# Allegro board 2017-03-26_LED-Panel_G4_V1.brd
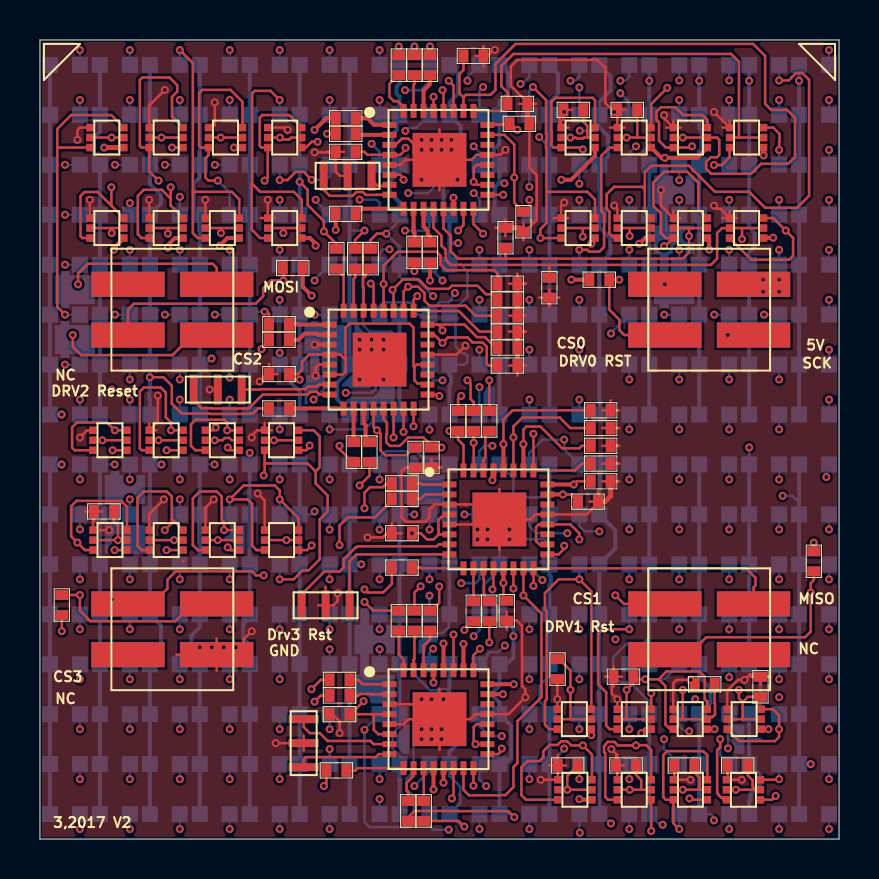
[diagram p0: board, top side]
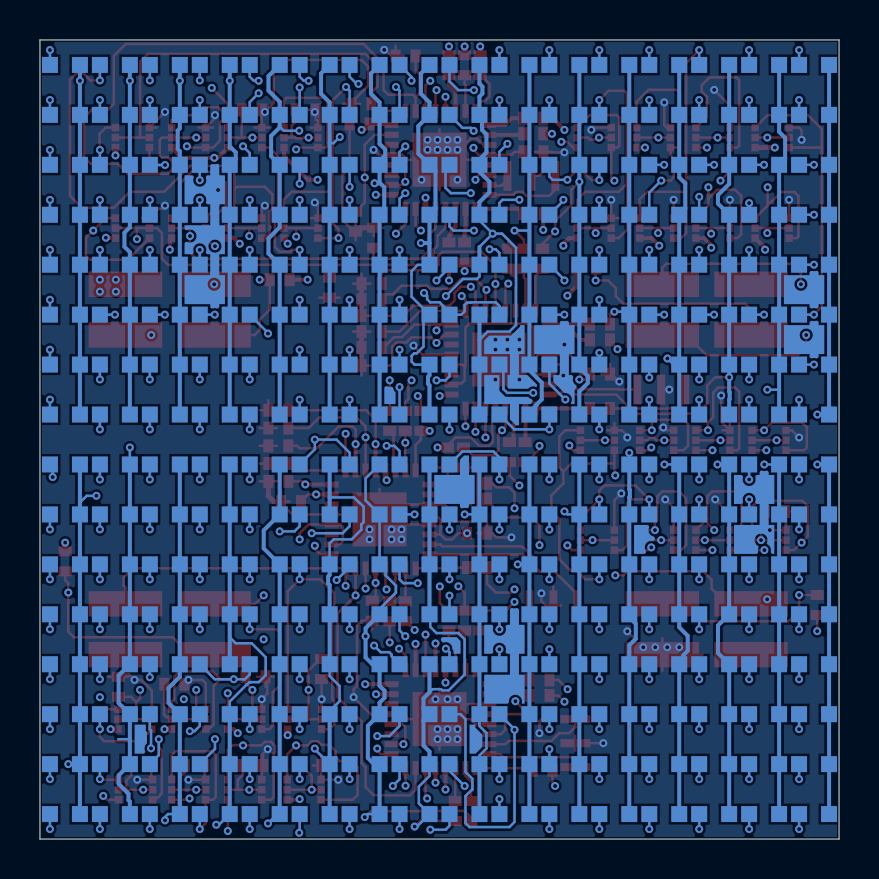
[diagram p1: board, bottom side, seen from below]

Outline 40 x 40 mm; copper layers: TOP, GND, LAYER 1, LAYER_2, PWR, BOTTOM. Coordinates in mm from the lower left corner of the outline.
Outline path: 0,40 0,0 40,0 40,40 0,40

## Design rules (mm)
constraint set DEFAULT: min track width 0.127

## Placement (name value [footprint] x y rotation side)
C1  CAP NP  [EIA0402]  15.3 34.4 180 top
C2  CAP NP  [EIA0402]  15 6.25 180 top
C3  CAP NP  [EIA0402]  18.12 15.31 180 top
C4  CAP NP  [EIA0402]  11.96 23.27 180 top
D1  LED  [LED-0603]  3.75 1.25 180 bottom
D2  LED  [LED-0603]  6.25 16.25 180 bottom
D3  LED  [LED-0603]  6.25 1.25 180 bottom
D4  LED  [LED-0603]  1.25 18.75 180 bottom
D5  LED  [LED-0603]  1.25 16.25 180 bottom
D6  LED  [LED-0603]  1.25 13.75 180 bottom
D7  LED  [LED-0603]  1.25 11.25 180 bottom
D8  LED  [LED-0603]  1.25 8.75 180 bottom
D9  LED  [LED-0603]  1.25 6.25 180 bottom
D10  LED  [LED-0603]  1.25 3.75 180 bottom
D11  LED  [LED-0603]  1.25 1.25 180 bottom
D12  LED  [LED-0603]  3.75 18.75 180 bottom
D13  LED  [LED-0603]  3.75 16.25 180 bottom
D14  LED  [LED-0603]  3.75 13.75 180 bottom
D15  LED  [LED-0603]  3.75 11.25 180 bottom
D16  LED  [LED-0603]  3.75 8.75 180 bottom
D17  LED  [LED-0603]  3.75 6.25 180 bottom
D18  LED  [LED-0603]  3.75 3.75 180 bottom
D19  LED  [LED-0603]  6.25 18.75 180 bottom
D20  LED  [LED-0603]  6.25 13.75 180 bottom
D21  LED  [LED-0603]  6.25 11.25 180 bottom
D22  LED  [LED-0603]  6.25 8.75 180 bottom
D23  LED  [LED-0603]  6.25 6.25 180 bottom
D24  LED  [LED-0603]  6.25 3.75 180 bottom
D25  LED  [LED-0603]  8.75 18.75 180 bottom
D26  LED  [LED-0603]  8.75 16.25 180 bottom
D27  LED  [LED-0603]  8.75 13.75 180 bottom
D28  LED  [LED-0603]  8.75 11.25 180 bottom
D29  LED  [LED-0603]  8.75 8.75 180 bottom
D30  LED  [LED-0603]  8.75 6.25 180 bottom
D31  LED  [LED-0603]  8.75 3.75 180 bottom
D32  LED  [LED-0603]  8.75 1.25 180 bottom
D33  LED  [LED-0603]  11.25 18.75 180 bottom
D34  LED  [LED-0603]  11.25 16.25 180 bottom
D35  LED  [LED-0603]  11.25 13.75 180 bottom
D36  LED  [LED-0603]  11.25 11.25 180 bottom
D37  LED  [LED-0603]  11.25 8.75 180 bottom
D38  LED  [LED-0603]  11.25 6.25 180 bottom
D39  LED  [LED-0603]  11.25 3.75 180 bottom
D40  LED  [LED-0603]  11.25 1.25 180 bottom
D41  LED  [LED-0603]  13.75 18.75 180 bottom
D42  LED  [LED-0603]  13.75 16.25 180 bottom
D43  LED  [LED-0603]  13.75 13.75 180 bottom
D44  LED  [LED-0603]  13.75 11.25 180 bottom
D45  LED  [LED-0603]  13.75 8.75 180 bottom
D46  LED  [LED-0603]  13.75 6.25 180 bottom
D47  LED  [LED-0603]  13.75 3.75 180 bottom
D48  LED  [LED-0603]  13.75 1.25 180 bottom
D49  LED  [LED-0603]  16.25 18.75 180 bottom
D50  LED  [LED-0603]  16.25 16.25 180 bottom
D51  LED  [LED-0603]  16.25 13.75 180 bottom
D52  LED  [LED-0603]  16.25 11.25 180 bottom
D53  LED  [LED-0603]  16.25 8.75 180 bottom
D54  LED  [LED-0603]  16.25 6.25 180 bottom
D55  LED  [LED-0603]  16.25 3.75 180 bottom
D56  LED  [LED-0603]  16.25 1.25 180 bottom
D57  LED  [LED-0603]  18.75 18.75 180 bottom
D58  LED  [LED-0603]  18.75 16.25 180 bottom
D59  LED  [LED-0603]  18.75 13.75 180 bottom
D60  LED  [LED-0603]  18.75 11.25 180 bottom
D61  LED  [LED-0603]  18.75 8.75 180 bottom
D62  LED  [LED-0603]  18.75 6.25 180 bottom
D63  LED  [LED-0603]  18.75 3.75 180 bottom
D64  LED  [LED-0603]  18.75 1.25 180 bottom
D65  LED  [LED-0603]  21.25 36.25 180 bottom
D66  LED  [LED-0603]  21.25 33.75 180 bottom
D67  LED  [LED-0603]  21.25 31.25 180 bottom
D68  LED  [LED-0603]  21.25 28.75 180 bottom
D69  LED  [LED-0603]  21.25 26.25 180 bottom
D70  LED  [LED-0603]  21.25 21.25 180 bottom
D71  LED  [LED-0603]  23.75 36.25 180 bottom
D72  LED  [LED-0603]  23.75 33.75 180 bottom
D73  LED  [LED-0603]  23.75 31.25 180 bottom
D74  LED  [LED-0603]  23.75 28.75 180 bottom
D75  LED  [LED-0603]  23.75 26.25 180 bottom
D76  LED  [LED-0603]  23.75 23.75 180 bottom
D77  LED  [LED-0603]  23.75 21.25 180 bottom
D78  LED  [LED-0603]  26.25 33.75 180 bottom
D79  LED  [LED-0603]  26.25 31.25 180 bottom
D80  LED  [LED-0603]  26.25 28.75 180 bottom
D81  LED  [LED-0603]  26.25 26.25 180 bottom
D82  LED  [LED-0603]  26.25 23.75 180 bottom
D83  LED  [LED-0603]  26.25 21.25 180 bottom
D84  LED  [LED-0603]  21.25 38.75 180 bottom
D85  LED  [LED-0603]  21.25 23.75 180 bottom
D86  LED  [LED-0603]  23.75 38.75 180 bottom
D87  LED  [LED-0603]  26.25 38.75 180 bottom
D88  LED  [LED-0603]  26.25 36.25 180 bottom
D89  LED  [LED-0603]  28.75 38.75 180 bottom
D90  LED  [LED-0603]  28.75 36.25 180 bottom
D91  LED  [LED-0603]  28.75 33.75 180 bottom
D92  LED  [LED-0603]  28.75 31.25 180 bottom
D93  LED  [LED-0603]  28.75 28.75 180 bottom
D94  LED  [LED-0603]  28.75 26.25 180 bottom
D95  LED  [LED-0603]  28.75 23.75 180 bottom
D96  LED  [LED-0603]  28.75 21.25 180 bottom
D97  LED  [LED-0603]  31.25 38.75 180 bottom
D98  LED  [LED-0603]  31.25 36.25 180 bottom
D99  LED  [LED-0603]  31.25 33.75 180 bottom
D100  LED  [LED-0603]  31.25 31.25 180 bottom
D101  LED  [LED-0603]  31.25 28.75 180 bottom
D102  LED  [LED-0603]  31.25 26.25 180 bottom
D103  LED  [LED-0603]  31.25 23.75 180 bottom
D104  LED  [LED-0603]  31.25 21.25 180 bottom
D105  LED  [LED-0603]  33.75 38.75 180 bottom
D106  LED  [LED-0603]  33.75 36.25 180 bottom
D107  LED  [LED-0603]  33.75 33.75 180 bottom
D108  LED  [LED-0603]  33.75 31.25 180 bottom
D109  LED  [LED-0603]  33.75 28.75 180 bottom
D110  LED  [LED-0603]  33.75 26.25 180 bottom
D111  LED  [LED-0603]  33.75 23.75 180 bottom
D112  LED  [LED-0603]  33.75 21.25 180 bottom
D113  LED  [LED-0603]  36.25 38.75 180 bottom
D114  LED  [LED-0603]  36.25 36.25 180 bottom
D115  LED  [LED-0603]  36.25 33.75 180 bottom
D116  LED  [LED-0603]  36.25 31.25 180 bottom
D117  LED  [LED-0603]  36.25 28.75 180 bottom
D118  LED  [LED-0603]  36.25 26.25 180 bottom
D119  LED  [LED-0603]  36.25 23.75 180 bottom
D120  LED  [LED-0603]  36.25 21.25 180 bottom
D121  LED  [LED-0603]  38.75 38.75 180 bottom
D122  LED  [LED-0603]  38.75 36.25 180 bottom
D123  LED  [LED-0603]  38.75 33.75 180 bottom
D124  LED  [LED-0603]  38.75 31.25 180 bottom
D125  LED  [LED-0603]  38.75 28.75 180 bottom
D126  LED  [LED-0603]  38.75 26.25 180 bottom
D127  LED  [LED-0603]  38.75 23.75 180 bottom
D128  LED  [LED-0603]  38.75 21.25 180 bottom
D129  LED  [LED-0603]  1.25 38.75 180 bottom
D130  LED  [LED-0603]  1.25 36.25 180 bottom
D131  LED  [LED-0603]  1.25 33.75 180 bottom
D132  LED  [LED-0603]  1.25 31.25 180 bottom
D133  LED  [LED-0603]  1.25 28.75 180 bottom
D134  LED  [LED-0603]  1.25 26.25 180 bottom
D135  LED  [LED-0603]  1.25 23.75 180 bottom
D136  LED  [LED-0603]  1.25 21.25 180 bottom
D137  LED  [LED-0603]  3.75 38.75 180 bottom
D138  LED  [LED-0603]  3.75 36.25 180 bottom
D139  LED  [LED-0603]  3.75 33.75 180 bottom
D140  LED  [LED-0603]  3.75 31.25 180 bottom
D141  LED  [LED-0603]  3.75 28.75 180 bottom
D142  LED  [LED-0603]  3.75 26.25 180 bottom
D143  LED  [LED-0603]  3.75 21.25 180 bottom
D144  LED  [LED-0603]  6.25 38.75 180 bottom
D145  LED  [LED-0603]  6.25 36.25 180 bottom
D146  LED  [LED-0603]  6.25 33.75 180 bottom
D147  LED  [LED-0603]  6.25 31.25 180 bottom
D148  LED  [LED-0603]  6.25 28.75 180 bottom
D149  LED  [LED-0603]  6.25 26.25 180 bottom
D150  LED  [LED-0603]  6.25 23.75 180 bottom
D151  LED  [LED-0603]  6.25 21.25 180 bottom
D152  LED  [LED-0603]  3.75 23.75 180 bottom
D153  LED  [LED-0603]  8.75 38.75 180 bottom
D154  LED  [LED-0603]  8.75 36.25 180 bottom
D155  LED  [LED-0603]  8.75 33.75 180 bottom
D156  LED  [LED-0603]  8.75 31.25 180 bottom
D157  LED  [LED-0603]  8.75 28.75 180 bottom
D158  LED  [LED-0603]  8.75 26.25 180 bottom
D159  LED  [LED-0603]  8.75 23.75 180 bottom
D160  LED  [LED-0603]  8.75 21.25 180 bottom
D161  LED  [LED-0603]  11.25 38.75 180 bottom
D162  LED  [LED-0603]  11.25 36.25 180 bottom
D163  LED  [LED-0603]  11.25 33.75 180 bottom
D164  LED  [LED-0603]  11.25 31.25 180 bottom
D165  LED  [LED-0603]  11.25 28.75 180 bottom
D166  LED  [LED-0603]  11.25 26.25 180 bottom
D167  LED  [LED-0603]  11.25 23.75 180 bottom
D168  LED  [LED-0603]  11.25 21.25 180 bottom
D169  LED  [LED-0603]  13.75 38.75 180 bottom
D170  LED  [LED-0603]  13.75 36.25 180 bottom
D171  LED  [LED-0603]  13.75 33.75 180 bottom
D172  LED  [LED-0603]  13.75 31.25 180 bottom
D173  LED  [LED-0603]  13.75 28.75 180 bottom
D174  LED  [LED-0603]  13.75 26.25 180 bottom
D175  LED  [LED-0603]  13.75 23.75 180 bottom
D176  LED  [LED-0603]  13.75 21.25 180 bottom
D177  LED  [LED-0603]  16.25 38.75 180 bottom
D178  LED  [LED-0603]  16.25 36.25 180 bottom
D179  LED  [LED-0603]  16.25 33.75 180 bottom
D180  LED  [LED-0603]  16.25 31.25 180 bottom
D181  LED  [LED-0603]  16.25 28.75 180 bottom
D182  LED  [LED-0603]  16.25 26.25 180 bottom
D183  LED  [LED-0603]  16.25 23.75 180 bottom
D184  LED  [LED-0603]  16.25 21.25 180 bottom
D185  LED  [LED-0603]  18.75 38.75 180 bottom
D186  LED  [LED-0603]  18.75 36.25 180 bottom
D187  LED  [LED-0603]  18.75 33.75 180 bottom
D188  LED  [LED-0603]  18.75 31.25 180 bottom
D189  LED  [LED-0603]  18.75 28.75 180 bottom
D190  LED  [LED-0603]  18.75 26.25 180 bottom
D191  LED  [LED-0603]  18.75 23.75 180 bottom
D192  LED  [LED-0603]  18.75 21.25 180 bottom
D193  LED  [LED-0603]  21.25 16.25 180 bottom
D194  LED  [LED-0603]  21.25 3.75 180 bottom
D195  LED  [LED-0603]  21.25 1.25 180 bottom
D196  LED  [LED-0603]  23.75 13.75 180 bottom
D197  LED  [LED-0603]  23.75 3.75 180 bottom
D198  LED  [LED-0603]  23.75 1.25 180 bottom
D199  LED  [LED-0603]  26.25 16.25 180 bottom
D200  LED  [LED-0603]  26.25 1.25 180 bottom
D201  LED  [LED-0603]  21.25 18.75 180 bottom
D202  LED  [LED-0603]  21.25 13.75 180 bottom
D203  LED  [LED-0603]  21.25 11.25 180 bottom
D204  LED  [LED-0603]  21.25 8.75 180 bottom
D205  LED  [LED-0603]  21.25 6.25 180 bottom
D206  LED  [LED-0603]  23.75 18.75 180 bottom
D207  LED  [LED-0603]  23.75 16.25 180 bottom
D208  LED  [LED-0603]  23.75 11.25 180 bottom
D209  LED  [LED-0603]  23.75 8.75 180 bottom
D210  LED  [LED-0603]  23.75 6.25 180 bottom
D211  LED  [LED-0603]  26.25 18.75 180 bottom
D212  LED  [LED-0603]  26.25 13.75 180 bottom
D213  LED  [LED-0603]  26.25 11.25 180 bottom
D214  LED  [LED-0603]  26.25 8.75 180 bottom
D215  LED  [LED-0603]  26.25 6.25 180 bottom
D216  LED  [LED-0603]  26.25 3.75 180 bottom
D217  LED  [LED-0603]  28.75 18.75 180 bottom
D218  LED  [LED-0603]  28.75 16.25 180 bottom
D219  LED  [LED-0603]  28.75 13.75 180 bottom
D220  LED  [LED-0603]  28.75 11.25 180 bottom
D221  LED  [LED-0603]  28.75 8.75 180 bottom
D222  LED  [LED-0603]  28.75 6.25 180 bottom
D223  LED  [LED-0603]  28.75 3.75 180 bottom
D224  LED  [LED-0603]  28.75 1.25 180 bottom
D225  LED  [LED-0603]  31.25 18.75 180 bottom
D226  LED  [LED-0603]  31.25 16.25 180 bottom
D227  LED  [LED-0603]  31.25 13.75 180 bottom
D228  LED  [LED-0603]  31.25 11.25 180 bottom
D229  LED  [LED-0603]  31.25 8.75 180 bottom
D230  LED  [LED-0603]  31.25 6.25 180 bottom
D231  LED  [LED-0603]  31.25 3.75 180 bottom
D232  LED  [LED-0603]  31.25 1.25 180 bottom
D233  LED  [LED-0603]  33.75 18.75 180 bottom
D234  LED  [LED-0603]  33.75 16.25 180 bottom
D235  LED  [LED-0603]  33.75 13.75 180 bottom
D236  LED  [LED-0603]  33.75 11.25 180 bottom
D237  LED  [LED-0603]  33.75 8.75 180 bottom
D238  LED  [LED-0603]  33.75 6.25 180 bottom
D239  LED  [LED-0603]  33.75 3.75 180 bottom
D240  LED  [LED-0603]  33.75 1.25 180 bottom
D241  LED  [LED-0603]  36.25 18.75 180 bottom
D242  LED  [LED-0603]  36.25 16.25 180 bottom
D243  LED  [LED-0603]  36.25 13.75 180 bottom
D244  LED  [LED-0603]  36.25 11.25 180 bottom
D245  LED  [LED-0603]  36.25 8.75 180 bottom
D246  LED  [LED-0603]  36.25 6.25 180 bottom
D247  LED  [LED-0603]  36.25 3.75 180 bottom
D248  LED  [LED-0603]  36.25 1.25 180 bottom
D249  LED  [LED-0603]  38.75 18.75 180 bottom
D250  LED  [LED-0603]  38.75 16.25 180 bottom
D251  LED  [LED-0603]  38.75 13.75 180 bottom
D252  LED  [LED-0603]  38.75 11.25 180 bottom
D253  LED  [LED-0603]  38.75 8.75 180 bottom
D254  LED  [LED-0603]  38.75 6.25 180 bottom
D255  LED  [LED-0603]  38.75 3.75 180 bottom
D256  LED  [LED-0603]  38.75 1.25 180 bottom
J1  WM9514-ND  [HDR-SMD-2X2]  33.5 26.5 0 top
J2  WM9514-ND  [HDR-SMD-2X2]  33.5 10.5 0 top
J3  WM9514-ND  [HDR-SMD-2X2]  6.63 26.5 0 top
J4  WM9514-ND  [HDR-SMD-2X2]  6.63 10.5 0 top
NOREF  -  []  40 0 90 top
NOREF#2  -  []  0 40 0 top
Q1  DMC2400UV  [SOT563]  8.28 15.46 0 top
Q2  DMC2400UV  [SOT563]  11.25 15.46 0 top
Q3  DMC2400UV  [SOT563]  11.25 20.46 0 top
Q4  DMC2400UV  [SOT563]  8.28 20.46 0 top
Q5  DMC2400UV  [SOT563]  5.47 20.46 0 top
Q6  DMC2400UV  [SOT563]  2.66 20.46 0 top
Q7  DMC2400UV  [SOT563]  2.66 15.46 0 top
Q8  DMC2400UV  [SOT563]  5.47 15.46 0 top
Q9  DMC2400UV  [SOT563]  28.9 31.08 0 top
Q10  DMC2400UV  [SOT563]  26.09 31.08 0 top
Q11  DMC2400UV  [SOT563]  34.52 35.61 0 top
Q12  DMC2400UV  [SOT563]  31.71 35.61 0 top
Q13  DMC2400UV  [SOT563]  28.9 35.61 0 top
Q14  DMC2400UV  [SOT563]  26.09 35.61 0 top
Q15  DMC2400UV  [SOT563]  34.52 31.08 0 top
Q16  DMC2400UV  [SOT563]  31.71 31.08 0 top
Q17  DMC2400UV  [SOT563]  8.28 31.08 0 top
Q18  DMC2400UV  [SOT563]  11.4 31.08 0 top
Q19  DMC2400UV  [SOT563]  11.4 35.61 0 top
Q20  DMC2400UV  [SOT563]  8.43 35.61 0 top
Q21  DMC2400UV  [SOT563]  5.47 35.61 0 top
Q22  DMC2400UV  [SOT563]  2.5 35.61 0 top
Q23  DMC2400UV  [SOT563]  2.5 31.08 0 top
Q24  DMC2400UV  [SOT563]  5.47 31.08 0 top
Q25  DMC2400UV  [SOT563]  28.9 2.97 0 top
Q26  DMC2400UV  [SOT563]  25.93 2.97 0 top
Q27  DMC2400UV  [SOT563]  25.9 6.5 0 top
Q28  DMC2400UV  [SOT563]  28.9 6.5 0 top
Q29  DMC2400UV  [SOT563]  31.7 6.5 0 top
Q30  DMC2400UV  [SOT563]  34.4 6.5 0 top
Q31  DMC2400UV  [SOT563]  34.36 2.97 0 top
Q32  DMC2400UV  [SOT563]  31.71 2.97 0 top
R1  4.7K  [EIA0402]  1.09 11.71 270 top
R2  210/0.1%  [EIA0402]  18.12 13.59 180 top
R3  210/0.1%  [EIA0402]  22.49 11.4 270 top
R4  210/0.1%  [EIA0402]  21.71 11.4 270 top
R5  210/0.1%  [EIA0402]  18.12 17.03 180 top
R6  210/0.1%  [EIA0402]  18.12 17.81 180 top
R7  210/0.1%  [EIA0402]  20.93 20.93 90 top
R8  210/0.1%  [EIA0402]  21.71 20.93 90 top
R9  210/0.1%  [EIA0402]  22.49 20.93 90 top
R10  4.7K  [EIA0402]  28 28 180 top
R11  210/0.1%  [EIA0402]  15.3 31.3 180 top
R12  210/0.1%  [EIA0402]  19.52 29.37 270 top
R13  210/0.1%  [EIA0402]  18.74 29.37 270 top
R14  210/0.1%  [EIA0402]  15.31 35.3 180 top
R15  210/0.1%  [EIA0402]  15.31 36.08 180 top
R16  210/0.1%  [EIA0402]  17.96 38.74 90 top
R17  210/0.1%  [EIA0402]  18.74 38.74 90 top
R18  210/0.1%  [EIA0402]  19.52 38.74 90 top
R19  4.7K  [EIA0402]  12.65 28.58 0 top
R20  210/0.1%  [EIA0402]  16.49 19.37 270 top
R21  210/0.1%  [EIA0402]  15.71 19.37 270 top
R22  210/0.1%  [EIA0402]  11.96 21.56 180 top
R23  210/0.1%  [EIA0402]  11.96 24.99 180 top
R24  210/0.1%  [EIA0402]  11.96 25.77 180 top
R25  210/0.1%  [EIA0402]  14.84 29.05 90 top
R26  210/0.1%  [EIA0402]  15.78 29.05 90 top
R27  210/0.1%  [EIA0402]  16.56 29.05 90 top
R28  4.7K  [EIA0402]  38.74 13.9 90 top
R29  210/0.1%  [EIA0402]  14.84 3.44 180 top
R30  210/0.1%  [EIA0402]  19.21 1.41 270 top
R31  210/0.1%  [EIA0402]  18.43 1.41 270 top
R32  210/0.1%  [EIA0402]  15 7.19 180 top
R33  210/0.1%  [EIA0402]  15 7.97 180 top
R34  210/0.1%  [EIA0402]  17.96 10.93 90 top
R35  210/0.1%  [EIA0402]  18.74 10.93 90 top
R36  210/0.1%  [EIA0402]  19.52 10.93 90 top
R37  4.7K  [EIA0402]  27.43 16.89 0 top
R38  4.7K  [EIA0402]  28.07 17.91 0 top
R39  4.7K  [EIA0402]  28.07 18.8 0 top
R40  4.7K  [EIA0402]  28.07 19.68 0 top
R41  4.7K  [EIA0402]  28.07 20.57 0 top
R42  4.7K  [EIA0402]  28.07 21.46 0 top
R43  4.7K  [EIA0402]  3.2 16.4 180 top
R44  4.7K  [EIA0402]  23.37 11.43 270 top
R45  4.7K  [EIA0402]  24.2 30.9 270 top
R46  4.7K  [EIA0402]  24 35.8 0 top
R47  4.7K  [EIA0402]  23.9 36.8 0 top
R48  4.7K  [EIA0402]  21.7 39.2 0 top
R49  4.7K  [EIA0402]  29.4 36.5 180 top
R50  4.7K  [EIA0402]  26.7 36.5 180 top
R51  4.7K  [EIA0402]  25.5 27.6 270 top
R52  4.7K  [EIA0402]  23.3 30.1 90 top
R53  4.7K  [EIA0402]  23.4 23.7 0 top
R54  4.7K  [EIA0402]  23.4 24.6 0 top
R55  4.7K  [EIA0402]  23.4 25.4 0 top
R56  4.7K  [EIA0402]  23.4 26.2 0 top
R57  4.7K  [EIA0402]  23.4 27 0 top
R58  4.7K  [EIA0402]  23.4 27.8 0 top
R59  4.7K  [EIA0402]  18.8 19.1 270 top
R60  4.7K  [EIA0402]  19.6 19.1 270 top
R61  4.7K  [EIA0402]  29.34 3.68 180 top
R62  4.7K  [EIA0402]  26.42 3.68 180 top
R63  4.7K  [EIA0402]  25.91 8.51 270 top
R64  4.7K  [EIA0402]  29.21 8.13 180 top
R65  4.7K  [EIA0402]  33.27 7.75 180 top
R66  4.7K  [EIA0402]  36.07 7.62 90 top
R67  4.7K  [EIA0402]  34.92 3.68 180 top
R68  4.7K  [EIA0402]  32.26 3.68 180 top
U1  ATMEGA328P-MU  [QFN32]  23 16 0 top
U2  ATMEGA328P-MU  [QFN32]  20 34 0 top
U3  ATMEGA328P-MU  [QFN32]  17 24 0 top
U4  ATMEGA328P-MU  [QFN32]  20 6 0 top
Y1  CSTCE20M0V53-R0  [CSTCE_V_C]  14.3 11.7 180 top
Y2  CSTCE20M0V53-R0  [CSTCE_V_C]  15.4 33.2 0 top
Y3  CSTCE20M0V53-R0  [CSTCE_V_C]  8.9 22.5 0 top
Y4  CSTCE20M0V53-R0  [CSTCE_V_C]  13.2 4.8 90 top

## Library data of the parts
C1-C4 = CAP NP
D1-D256 = LED
J1-J4 = CONN RECT 2x2
Q1-Q32 = MPM3002_0
R1-R68 = RESISTOR
U1-U4 = ATMEGA328P-MU_6
Y1-Y4 = CRYSTAL_0

## Footprints (pads in the part's own frame, mm; a bottom-side part is the same pattern mirrored in y, then rotated)
CSTCE_V_C
  rect 0.4x1.5 smd: 1(-1.2,0) 2(1.2,0) 3(0,0)
EIA0402
  rect 0.5x0.65 smd: 1(-0.5,0) 2(0.5,0)
HDR-SMD-2X2
  rect 3.68x1.27 smd: 1(-2.22,1.27) 2(-2.22,-1.27) 3(2.22,-1.27) 4(2.22,1.27)
LED-0603
  rect 0.8x0.8 smd: 1(-0.75,0) 2(0.75,0)
QFN32
  rect 0.7x0.3 smd: 1(-2.5,1.75) 2(-2.5,1.25) 3(-2.5,0.75) 4(-2.5,0.25) 5(-2.5,-0.25) 6(-2.5,-0.75) 7(-2.5,-1.25) 8(-2.5,-1.75) 17(2.4,-1.75) 18(2.4,-1.25) 19(2.4,-0.75) 20(2.4,-0.25) 21(2.4,0.25) 22(2.4,0.75) 23(2.4,1.25) 24(2.4,1.75)
  rect 0.3x0.7 smd: 9(-1.8,-2.45) 10(-1.3,-2.45) 11(-0.8,-2.45) 12(-0.3,-2.45) 13(0.2,-2.45) 14(0.7,-2.45) 15(1.2,-2.45) 16(1.7,-2.45) 25(1.7,2.45) 26(1.2,2.45) 27(0.7,2.45) 28(0.2,2.45) 29(-0.3,2.45) 30(-0.8,2.45) 31(-1.3,2.45) 32(-1.8,2.45)
  rect 2.7x2.7 smd: 33(0,0)
SOT563
  rect 0.375x0.375 smd: 1(0,0) 2(0,-0.5) 3(0,-1) 4(1.7,-1) 5(1.7,-0.5) 6(1.7,0)

## Nets
5V: C1.1 C2.1 C3.1 C4.1 J1.4 Q1.4(S2) Q2.4(S2) Q3.4(S2) Q4.4(S2) Q5.4(S2) Q6.4(S2) Q7.4(S2) Q8.4(S2) Q9.4(S2) Q10.4(S2) Q11.4(S2) Q12.4(S2) Q13.4(S2) Q14.4(S2) Q15.4(S2) Q16.4(S2) Q17.4(S2) Q18.4(S2) Q19.4(S2) Q20.4(S2) Q21.4(S2) Q22.4(S2) Q23.4(S2) Q24.4(S2) Q25.4(S2) Q26.4(S2) Q27.4(S2) Q28.4(S2) Q29.4(S2) Q30.4(S2) Q31.4(S2) Q32.4(S2) R1.2 R10.2 R19.2 R28.2 U1.4 U1.6(VCC2) U1.18 U1.20 U2.4 U2.6(VCC2) U2.18 U2.20 U3.4 U3.6(VCC2) U3.18 U3.20 U4.4 U4.6(VCC2) U4.18 U4.20
GND: C1.2 C2.2 C3.2 C4.2 J4.3 Q1.1 Q2.1 Q3.1 Q4.1 Q5.1 Q6.1 Q7.1 Q8.1 Q9.1 Q10.1 Q11.1 Q12.1 Q13.1 Q14.1 Q15.1 Q16.1 Q17.1 Q18.1 Q19.1 Q20.1 Q21.1 Q22.1 Q23.1 Q24.1 Q25.1 Q26.1 Q27.1 Q28.1 Q29.1 Q30.1 Q31.1 Q32.1 R37.2 R38.2 R39.2 R40.2 R41.2 R42.2 R43.2 R44.2 R45.2 R46.2 R47.2 R48.2 R49.2 R50.2 R51.2 R52.2 R53.2 R54.2 R55.2 R56.2 R57.2 R58.2 R59.2 R60.2 R61.2 R62.2 R63.2 R64.2 R65.2 R66.2 R67.2 R68.2 U1.3 U1.5 U1.21 U1.33 U2.3 U2.5 U2.21 U2.33 U3.3 U3.5 U3.21 U3.33 U4.3 U4.5 U4.21 U4.33 Y1.3 Y2.3 Y3.3 Y4.3
CS0: J1.1 U2.14
CS1: J2.1 U4.14
CS2: J3.3 U3.14
CS3: J4.1 U1.14
DRV0_COL0: R18.1 U2.30
DRV0_COL1: R17.1 U2.31
DRV0_COL2: R16.1 U2.32
DRV0_COL3: R15.1 U2.1
DRV0_COL4: R14.1 U2.2
DRV0_COL5: R11.1 U2.9
DRV0_COL6: R13.1 U2.10
DRV0_COL7: R12.1 U2.11
DRV0_RESET: J1.2 R10.1 U2.29
DRV0_ROW0: Q9.2 Q9.5 R45.1 U2.23
DRV0_ROW1: Q10.2 Q10.5 R46.1 U2.24
DRV0_ROW2: Q11.2 Q11.5 R47.1 U2.25
DRV0_ROW3: Q12.2 Q12.5 R48.1 U2.26
DRV0_ROW4: Q13.2 Q13.5 R49.1 U2.27
DRV0_ROW5: Q14.2 Q14.5 R50.1 U2.28
DRV0_ROW6: Q15.2 Q15.5 R51.1 U2.12
DRV0_ROW7: Q16.2 Q16.5 R52.1 U2.13
DRV1_COL0: R36.1 U4.30
DRV1_COL1: R35.1 U4.31
DRV1_COL2: R34.1 U4.32
DRV1_COL3: R33.1 U4.1
DRV1_COL4: R32.1 U4.2
DRV1_COL5: R29.1 U4.9
DRV1_COL6: R31.1 U4.10
DRV1_COL7: R30.1 U4.11
DRV1_RESET: J2.2 R28.1 U4.29
DRV1_ROW0: Q25.2 Q25.5 R61.1 U4.23
DRV1_ROW1: Q26.2 Q26.5 R62.1 U4.24
DRV1_ROW2: Q27.2 Q27.5 R63.1 U4.25
DRV1_ROW3: Q28.2 Q28.5 R64.1 U4.26
DRV1_ROW4: Q29.2 Q29.5 R65.1 U4.27
DRV1_ROW5: Q30.2 Q30.5 R66.1 U4.28
DRV1_ROW6: Q31.2 Q31.5 R67.1 U4.12
DRV1_ROW7: Q32.2 Q32.5 R68.1 U4.13
DRV2_COL0: R27.1 U3.30
DRV2_COL1: R26.1 U3.31
DRV2_COL2: R25.1 U3.32
DRV2_COL3: R24.1 U3.1
DRV2_COL4: R23.1 U3.2
DRV2_COL5: R22.1 U3.9
DRV2_COL6: R21.1 U3.10
DRV2_COL7: R20.1 U3.11
DRV2_RESET: J3.2 R19.1 U3.29
DRV2_ROW0: Q17.2 Q17.5 R53.1 U3.23
DRV2_ROW1: Q18.2 Q18.5 R54.1 U3.24
DRV2_ROW2: Q19.2 Q19.5 R55.1 U3.25
DRV2_ROW3: Q20.2 Q20.5 R56.1 U3.26
DRV2_ROW4: Q21.2 Q21.5 R57.1 U3.27
DRV2_ROW5: Q22.2 Q22.5 R58.1 U3.28
DRV2_ROW6: Q23.2 Q23.5 R59.1 U3.12
DRV2_ROW7: Q24.2 Q24.5 R60.1 U3.13
DRV3_COL0: R9.1 U1.30
DRV3_COL1: R8.1 U1.31
DRV3_COL2: R7.1 U1.32
DRV3_COL3: R6.1 U1.1
DRV3_COL4: R5.1 U1.2
DRV3_COL5: R2.1 U1.9
DRV3_COL6: R4.1 U1.10
DRV3_COL7: R3.1 U1.11
DRV3_RESET: J4.4 R1.1 U1.29
DRV3_ROW0: Q1.2 Q1.5 R37.1 U1.23
DRV3_ROW1: Q2.2 Q2.5 R38.1 U1.24
DRV3_ROW2: Q3.2 Q3.5 R39.1 U1.25
DRV3_ROW3: Q4.2 Q4.5 R40.1 U1.26
DRV3_ROW4: Q5.2 Q5.5 R41.1 U1.27
DRV3_ROW5: Q6.2 Q6.5 R42.1 U1.28
DRV3_ROW6: Q7.2 Q7.5 R43.1 U1.12
DRV3_ROW7: Q8.2 Q8.5 R44.1 U1.13
INV0_ROW0: D84.1(CATHODE) D86.1(CATHODE) D87.1(CATHODE) D89.1(CATHODE) D97.1(CATHODE) D105.1(CATHODE) D113.1(CATHODE) D121.1(CATHODE) Q9.3 Q9.6
INV0_ROW1: D65.1(CATHODE) D71.1(CATHODE) D88.1(CATHODE) D90.1(CATHODE) D98.1(CATHODE) D106.1(CATHODE) D114.1(CATHODE) D122.1(CATHODE) Q10.3 Q10.6
INV0_ROW2: D66.1(CATHODE) D72.1(CATHODE) D78.1(CATHODE) D91.1(CATHODE) D99.1(CATHODE) D107.1(CATHODE) D115.1(CATHODE) D123.1(CATHODE) Q11.3 Q11.6
INV0_ROW3: D67.1(CATHODE) D73.1(CATHODE) D79.1(CATHODE) D92.1(CATHODE) D100.1(CATHODE) D108.1(CATHODE) D116.1(CATHODE) D124.1(CATHODE) Q12.3 Q12.6
INV0_ROW4: D68.1(CATHODE) D74.1(CATHODE) D80.1(CATHODE) D93.1(CATHODE) D101.1(CATHODE) D109.1(CATHODE) D117.1(CATHODE) D125.1(CATHODE) Q13.3 Q13.6
INV0_ROW5: D69.1(CATHODE) D75.1(CATHODE) D81.1(CATHODE) D94.1(CATHODE) D102.1(CATHODE) D110.1(CATHODE) D118.1(CATHODE) D126.1(CATHODE) Q14.3 Q14.6
INV0_ROW6: D76.1(CATHODE) D82.1(CATHODE) D85.1(CATHODE) D95.1(CATHODE) D103.1(CATHODE) D111.1(CATHODE) D119.1(CATHODE) D127.1(CATHODE) Q15.3 Q15.6
INV0_ROW7: D70.1(CATHODE) D77.1(CATHODE) D83.1(CATHODE) D96.1(CATHODE) D104.1(CATHODE) D112.1(CATHODE) D120.1(CATHODE) D128.1(CATHODE) Q16.3 Q16.6
INV1_ROW0: D201.1(CATHODE) D206.1(CATHODE) D211.1(CATHODE) D217.1(CATHODE) D225.1(CATHODE) D233.1(CATHODE) D241.1(CATHODE) D249.1(CATHODE) Q25.3 Q25.6
INV1_ROW1: D193.1(CATHODE) D199.1(CATHODE) D207.1(CATHODE) D218.1(CATHODE) D226.1(CATHODE) D234.1(CATHODE) D242.1(CATHODE) D250.1(CATHODE) Q26.3 Q26.6
INV1_ROW2: D196.1(CATHODE) D202.1(CATHODE) D212.1(CATHODE) D219.1(CATHODE) D227.1(CATHODE) D235.1(CATHODE) D243.1(CATHODE) D251.1(CATHODE) Q27.3 Q27.6
INV1_ROW3: D203.1(CATHODE) D208.1(CATHODE) D213.1(CATHODE) D220.1(CATHODE) D228.1(CATHODE) D236.1(CATHODE) D244.1(CATHODE) D252.1(CATHODE) Q28.3 Q28.6
INV1_ROW4: D204.1(CATHODE) D209.1(CATHODE) D214.1(CATHODE) D221.1(CATHODE) D229.1(CATHODE) D237.1(CATHODE) D245.1(CATHODE) D253.1(CATHODE) Q29.3 Q29.6
INV1_ROW5: D205.1(CATHODE) D210.1(CATHODE) D215.1(CATHODE) D222.1(CATHODE) D230.1(CATHODE) D238.1(CATHODE) D246.1(CATHODE) D254.1(CATHODE) Q30.3 Q30.6
INV1_ROW6: D194.1(CATHODE) D197.1(CATHODE) D216.1(CATHODE) D223.1(CATHODE) D231.1(CATHODE) D239.1(CATHODE) D247.1(CATHODE) D255.1(CATHODE) Q31.3 Q31.6
INV1_ROW7: D195.1(CATHODE) D198.1(CATHODE) D200.1(CATHODE) D224.1(CATHODE) D232.1(CATHODE) D240.1(CATHODE) D248.1(CATHODE) D256.1(CATHODE) Q32.3 Q32.6
INV2_ROW0: D129.1(CATHODE) D137.1(CATHODE) D144.1(CATHODE) D153.1(CATHODE) D161.1(CATHODE) D169.1(CATHODE) D177.1(CATHODE) D185.1(CATHODE) Q17.3 Q17.6
INV2_ROW1: D130.1(CATHODE) D138.1(CATHODE) D145.1(CATHODE) D154.1(CATHODE) D162.1(CATHODE) D170.1(CATHODE) D178.1(CATHODE) D186.1(CATHODE) Q18.3 Q18.6
INV2_ROW2: D131.1(CATHODE) D139.1(CATHODE) D146.1(CATHODE) D155.1(CATHODE) D163.1(CATHODE) D171.1(CATHODE) D179.1(CATHODE) D187.1(CATHODE) Q19.3 Q19.6
INV2_ROW3: D132.1(CATHODE) D140.1(CATHODE) D147.1(CATHODE) D156.1(CATHODE) D164.1(CATHODE) D172.1(CATHODE) D180.1(CATHODE) D188.1(CATHODE) Q20.3 Q20.6
INV2_ROW4: D133.1(CATHODE) D141.1(CATHODE) D148.1(CATHODE) D157.1(CATHODE) D165.1(CATHODE) D173.1(CATHODE) D181.1(CATHODE) D189.1(CATHODE) Q21.3 Q21.6
INV2_ROW5: D134.1(CATHODE) D142.1(CATHODE) D149.1(CATHODE) D158.1(CATHODE) D166.1(CATHODE) D174.1(CATHODE) D182.1(CATHODE) D190.1(CATHODE) Q22.3 Q22.6
INV2_ROW6: D135.1(CATHODE) D150.1(CATHODE) D152.1(CATHODE) D159.1(CATHODE) D167.1(CATHODE) D175.1(CATHODE) D183.1(CATHODE) D191.1(CATHODE) Q23.3 Q23.6
INV2_ROW7: D136.1(CATHODE) D143.1(CATHODE) D151.1(CATHODE) D160.1(CATHODE) D168.1(CATHODE) D176.1(CATHODE) D184.1(CATHODE) D192.1(CATHODE) Q24.3 Q24.6
INV3_ROW0: D4.1(CATHODE) D12.1(CATHODE) D19.1(CATHODE) D25.1(CATHODE) D33.1(CATHODE) D41.1(CATHODE) D49.1(CATHODE) D57.1(CATHODE) Q1.3 Q1.6
INV3_ROW1: D2.1(CATHODE) D5.1(CATHODE) D13.1(CATHODE) D26.1(CATHODE) D34.1(CATHODE) D42.1(CATHODE) D50.1(CATHODE) D58.1(CATHODE) Q2.3 Q2.6
INV3_ROW2: D6.1(CATHODE) D14.1(CATHODE) D20.1(CATHODE) D27.1(CATHODE) D35.1(CATHODE) D43.1(CATHODE) D51.1(CATHODE) D59.1(CATHODE) Q3.3 Q3.6
INV3_ROW3: D7.1(CATHODE) D15.1(CATHODE) D21.1(CATHODE) D28.1(CATHODE) D36.1(CATHODE) D44.1(CATHODE) D52.1(CATHODE) D60.1(CATHODE) Q4.3 Q4.6
INV3_ROW4: D8.1(CATHODE) D16.1(CATHODE) D22.1(CATHODE) D29.1(CATHODE) D37.1(CATHODE) D45.1(CATHODE) D53.1(CATHODE) D61.1(CATHODE) Q5.3 Q5.6
INV3_ROW5: D9.1(CATHODE) D17.1(CATHODE) D23.1(CATHODE) D30.1(CATHODE) D38.1(CATHODE) D46.1(CATHODE) D54.1(CATHODE) D62.1(CATHODE) Q6.3 Q6.6
INV3_ROW6: D10.1(CATHODE) D18.1(CATHODE) D24.1(CATHODE) D31.1(CATHODE) D39.1(CATHODE) D47.1(CATHODE) D55.1(CATHODE) D63.1(CATHODE) Q7.3 Q7.6
INV3_ROW7: D1.1(CATHODE) D3.1(CATHODE) D11.1(CATHODE) D32.1(CATHODE) D40.1(CATHODE) D48.1(CATHODE) D56.1(CATHODE) D64.1(CATHODE) Q8.3 Q8.6
MISO: J2.4 U1.16 U2.16 U3.16 U4.16
MOSI: J3.4 U1.15 U2.15 U3.15 U4.15
SCK: J1.3 U1.17 U2.17 U3.17 U4.17
N07362: D65.2 D66.2 D67.2 D68.2 D69.2 D70.2 D84.2 D85.2 R12.2
N07417: D71.2 D72.2 D73.2 D74.2 D75.2 D76.2 D77.2 D86.2 R13.2
N07451: D78.2 D79.2 D80.2 D81.2 D82.2 D83.2 D87.2 D88.2 R11.2
N07485: D89.2 D90.2 D91.2 D92.2 D93.2 D94.2 D95.2 D96.2 R14.2
N07573: D97.2 D98.2 D99.2 D100.2 D101.2 D102.2 D103.2 D104.2 R15.2
N07585: D105.2 D106.2 D107.2 D108.2 D109.2 D110.2 D111.2 D112.2 R16.2
N07597: D113.2 D114.2 D115.2 D116.2 D117.2 D118.2 D119.2 D120.2 R17.2
N07609: D121.2 D122.2 D123.2 D124.2 D125.2 D126.2 D127.2 D128.2 R18.2
N141091: U2.7 Y2.2
N141095: U2.8 Y2.1
N142792: D193.2 D194.2 D195.2 D201.2 D202.2 D203.2 D204.2 D205.2 R30.2
N142798: D196.2 D197.2 D198.2 D206.2 D207.2 D208.2 D209.2 D210.2 R31.2
N142804: D199.2 D200.2 D211.2 D212.2 D213.2 D214.2 D215.2 D216.2 R29.2
N142810: D217.2 D218.2 D219.2 D220.2 D221.2 D222.2 D223.2 D224.2 R32.2
N142816: D225.2 D226.2 D227.2 D228.2 D229.2 D230.2 D231.2 D232.2 R33.2
N142822: D233.2 D234.2 D235.2 D236.2 D237.2 D238.2 D239.2 D240.2 R34.2
N142828: D241.2 D242.2 D243.2 D244.2 D245.2 D246.2 D247.2 D248.2 R35.2
N142834: D249.2 D250.2 D251.2 D252.2 D253.2 D254.2 D255.2 D256.2 R36.2
N143588: U4.7 Y4.2
N143590: U4.8 Y4.1
N146450: D4.2 D5.2 D6.2 D7.2 D8.2 D9.2 D10.2 D11.2 R3.2
N146456: D1.2 D12.2 D13.2 D14.2 D15.2 D16.2 D17.2 D18.2 R4.2
N146462: D2.2 D3.2 D19.2 D20.2 D21.2 D22.2 D23.2 D24.2 R2.2
N146468: D25.2 D26.2 D27.2 D28.2 D29.2 D30.2 D31.2 D32.2 R5.2
N146474: D33.2 D34.2 D35.2 D36.2 D37.2 D38.2 D39.2 D40.2 R6.2
N146480: D41.2 D42.2 D43.2 D44.2 D45.2 D46.2 D47.2 D48.2 R7.2
N146486: D49.2 D50.2 D51.2 D52.2 D53.2 D54.2 D55.2 D56.2 R8.2
N146492: D57.2 D58.2 D59.2 D60.2 D61.2 D62.2 D63.2 D64.2 R9.2
N147246: U1.7 Y1.2
N147248: U1.8 Y1.1
N150108: D129.2 D130.2 D131.2 D132.2 D133.2 D134.2 D135.2 D136.2 R20.2
N150114: D137.2 D138.2 D139.2 D140.2 D141.2 D142.2 D143.2 D152.2 R21.2
N150120: D144.2 D145.2 D146.2 D147.2 D148.2 D149.2 D150.2 D151.2 R22.2
N150126: D153.2 D154.2 D155.2 D156.2 D157.2 D158.2 D159.2 D160.2 R23.2
N150132: D161.2 D162.2 D163.2 D164.2 D165.2 D166.2 D167.2 D168.2 R24.2
N150138: D169.2 D170.2 D171.2 D172.2 D173.2 D174.2 D175.2 D176.2 R25.2
N150144: D177.2 D178.2 D179.2 D180.2 D181.2 D182.2 D183.2 D184.2 R26.2
N150150: D185.2 D186.2 D187.2 D188.2 D189.2 D190.2 D191.2 D192.2 R27.2
N150904: U3.7 Y3.2
N150906: U3.8 Y3.1

Pads without a net: J2 3; J3 1; J4 2; U1 19 22; U2 19 22; U3 19 22; U4 19 22

## Via types
v1: diameter 0.4, hole 0.2, TOP to BOTTOM, 555 vias

## Routing (per net, layer and track width the routed paths; a pad name or vN(x,y) marks a point on that pad's centre or on a via; arc(x,y) is an arc through that point)
5V: length 65.5
  TOP w0.127: R1.2 v1(1.09,10.41) ; v1(18.62,15.31) 19.06,15.31 19.37,15 19.7,15 19.96,15.25 ; Q10.4 27.79,29.99 v1(27.6,29.8) ; v1(9.4,14.6) 9.54,14.46 Q1.4 ; Q7.4 v1(3.74,14.46) ; 15.3,24 15.3,23.4 15.15,23.25 U3.6 ; 15.3,24 15.05,24.25 U3.4 13.47,24.25 13.12,23.9 13.12,23.49 12.91,23.27 ; 15.3,24 15.3,25.6 15.5,25.8 18.5,25.8 18.7,25.6 18.7,23.68 18.74,23.63 ; Q31.4 36.64,1.97 v1(36.83,2.16) ; Q4.4 9.54,19.46 v1(9.4,19.6) ; 12.91,23.27 C4.1 12.74,23 v1(13,23) ; 12.91,23.27 12.93,23.27 ; v1(18.3,34.6) 18.3,34.51 18.04,34.25 U2.4 16.39,34.25 16.24,34.4 C1.1 ; U4.18 v1(21.8,4.75) 21.71,4.84 21.71,5.6 21.86,5.75 U4.20 ; U1.6 19.96,15.25 ; 19.96,15.25 19.96,15.5 19.95,15.52 19.95,15.98 20.07,16.1 20.09,16.1 20.23,16.25 U1.4 ; U1.18 24.99,14.75 24.84,14.91 24.84,15.62 24.97,15.75 U1.20 26.55,15.75 27,15.3 v1(27,15) ; 18.74,23.63 18.74,22.96 18.9,22.81 19.34,22.81 U3.18 ; 18.74,23.63 18.86,23.75 U3.20 ; v1(33.77,5.5) Q29.4 ; U2.18 21.86,32.75 v1(21.71,32.9) 21.71,33.6 21.86,33.75 U2.20 ; 9.7,34.6 v1(9.71,34.61) Q20.4 ; v1(32.51,2.03) 32.58,1.97 Q32.4 ; v1(18.2,33) 18.2,33.09 18.04,33.25 U2.6 ; Q6.4 v1(3.64,19.46) ; Q3.4 13.32,19.46 13.5,19.64 v1(13.5,19.7) ; 16.71,6.25 16.71,5.47 16.93,5.25 U4.6 ; 16.71,6.25 15.94,6.25 15.94,6.25 15.55,6.25 ; 16.71,6.25 U4.4 ; Q19.4 13.31,34.61 13.6,34.9 v1(13.9,34.9) ; Q8.4 v1(6.34,14.46) ; Q2.4 13.36,14.46 v1(13.6,14.7) ; Q21.4 v1(6.61,34.61) 6.6,34.6 ; Q25.4 v1(30.6,0.4) 30.6,0.4 ; 15.55,6.25 v1(16.2,6.9) ; 15.55,6.25 C2.1 ; Q30.4 v1(36.47,5.5) ; Q5.4 v1(6.34,19.46)
  TOP w0.2: Q13.4 31.11,34.1 v1(31.27,34.1) 32.9,34.1 Q12.4 ; Q14.4 27.79,34.2 26.59,33 v1(26.1,33) ; Q27.4 v1(27.6,5.2) ; Q18.4 13.52,30.08 13.8,29.8 v1(13.8,29.7) ; Q11.4 v1(36.22,34.22) 36.2,34.2 ; Q23.4 3.7,29.58 v1(3.7,29.5) ; R28.2 v1(38.74,14.84) ; Q26.4 27.03,1.97 v1(27,2) ; v1(13.6,27.2) 13.15,27.65 R19.2 ; v1(30.1,5.3) 30.3,5.5 Q28.4 ; Q24.4 6.75,30.08 6.4,29.73 v1(6.4,29.6) ; Q17.4 9.38,30.08 v1(9,29.7) ; Q15.4 36.24,30.1 v1(36.7,30.1) ; R10.2 v1(26.6,28) ; Q16.4 33.5,29.99 v1(33.5,29.5) ; v1(30,29.8) 30.3,30.1 30.58,30.1 Q9.4
  TOP w0.25: Q22.4 v1(3.21,34.61)
  vias: v1(32.8,7) v1(36.2,28) v1(36.2,27.4) v1(37,28) v1(37,27.4) v1(37,7.1)
GND: length 177.4
  TOP w0.127: Q5.1 5.47,20.83 ; Q5.1 5.83,20.46 ; Q5.1 5.9,20.9 v1(5.9,22.2) ; v1(8.7,17) 8.28,16.58 Q1.1 ; 28.9,3.62 Q25.1 ; 28.9,3.62 28.9,4.2 v1(28.6,4.5) ; 28.9,3.62 R61.2 ; U2.5 18.04,33.75 18.29,34 U2.33 ; v1(14.9,12.3) 14.9,11.91 14.69,11.7 Y1.3 ; Q18.1 11.77,31.08 ; Q18.1 v1(11.4,32) ; Q18.1 11.04,31.08 ; R68.2 31.76,3.02 Q32.1 v1(32.57,2.97) ; Q16.1 31.71,31.45 ; Q16.1 32.07,31.08 ; Q16.1 31.08,31.71 v1(31.08,32.49) ; 27.5,16.89 R37.2 ; R37.2 27.93,17.39 ; R37.2 27.93,16.82 27.37,16.25 U1.21 24.79,16.25 24.54,16 U1.33 ; 31.34,35.61 Q12.1 ; Q12.1 31.71,35.98 ; Q12.1 32.07,35.61 ; Q12.1 31.24,36.08 v1(31.24,36.24) ; R47.2 24.4,36.87 23.57,37.7 23.57,38.67 23.9,39 27.9,39 28.3,38.6 28.3,36.84 v1(28.74,36.39) 28.9,36.24 Q13.1 ; R47.2 24.83,36.8 ; R47.2 23.97,36.8 ; R64.2 28.71,8.63 ; R64.2 28.71,7.62 ; R64.2 28.62,8.04 28.62,7.28 v1(28.9,7) Q28.1 ; R64.2 29.14,8.13 ; R64.2 28.28,8.13 ; 7.19,13.9 7.17,13.92 ; Q29.1 31.7,7.8 31.87,7.97 v1(32.57,7.97) ; R66.2 36.57,8.12 ; R66.2 35.56,8.12 ; R66.2 35.95,8.24 35.54,8.24 v1(35.27,7.97) 34.94,7.97 34.4,7.43 Q30.1 ; R66.2 36.07,7.69 ; 19.6,18.17 R60.2 ; R60.2 19.6,19.03 ; R60.2 20.1,18.6 ; Y2.3 15.01,33.2 14.8,33.41 C1.2 ; R42.2 28.57,21.97 ; R42.2 29,21.46 ; R42.2 28.14,21.46 ; v1(16.4,15.1) 16.4,15.1 17.16,15.1 17.37,15.31 C3.2 ; 24.2,29.97 R45.2 ; R45.2 24.2,30.83 ; R45.2 24.27,30.4 24.86,30.99 24.86,33.24 24.5,33.6 R46.2 ; 34.15,35.61 Q11.1 ; Q11.1 34.52,35.98 ; Q11.1 v1(33.74,36.39) ; v1(2,20.1) 2.36,20.46 Q6.1 ; U2.33 21.61,34 21.86,34.25 U2.21 23.05,34.25 v1(23.3,34.5) ; U2.33 19.89,34.11 18.94,34.11 18.71,34.34 18.71,34.79 18.44,35.06 18.13,35.06 18.13,35.06 18.11,35.06 17.8,34.75 U2.3 ; U2.33 20,35.53 ; U2.33 20,32.47 ; Q14.1 26,35.7 26,36.15 v1(26.24,36.39) ; Q14.1 26.45,35.61 ; Q14.1 26.09,35.98 ; Q15.1 34.89,31.08 ; Q15.1 34.52,31.45 ; Q15.1 34.05,31.55 33.87,31.55 33.74,31.68 v1(33.74,31.71) ; Q15.1 34.15,31.08 ; R62.2 26.34,3.68 ; R62.2 25.49,3.68 ; R62.2 25.93,3.67 Q26.1 v1(25.07,2.97) ; R62.2 25.92,4.19 ; v1(11,22.9) 11.37,23.27 C4.2 ; 23.47,27.8 R58.2 ; R58.2 24.33,27.8 ; R58.2 23.9,28.3 ; 18.1,15.3 18.11,15.31 ; 24.33,26.2 R56.2 23.47,26.2 ; R44.2 23.88,10.93 24.13,10.68 24.13,7.66 24.3,7.49 v1(24.3,7.1) 23.45,6.25 U4.21 21.79,6.25 21.54,6 U4.33 ; R44.2 23.37,11.36 ; R44.2 23.37,10.5 ; R61.2 29.27,3.68 ; R61.2 28.84,4.19 ; v1(10.6,10.4) 10.2,10 10.19,10 10.19,9.44 9.96,9.21 9.04,9.21 9.02,9.23 J4.3 ; 28.14,19.68 R40.2 29,19.68 ; 29,18.8 R39.2 28.14,18.8 ; J4.3 8.85,10.04 ; J4.3 6.83,9.23 ; J4.3 8.85,8.42 ; 23.47,23.7 R53.2 ; R53.2 24.33,23.7 ; R53.2 23.9,23.2 ; 28.14,17.91 R38.2 29,17.91 ; Y3.3 v1(8.5,22.5) ; C1.2 15.23,34.4 ; C1.2 14.77,34.38 v1(13.75,34.38) ; C1.2 14.37,34.4 ; Q13.1 29.26,35.61 ; Q13.1 28.53,35.61 ; v1(13.8,23.2) 13.8,23.59 13.96,23.75 U3.5 ; 20,4.47 U4.33 ; U4.33 20,7.53 ; U4.33 18.46,6 18.21,5.75 U4.5 ; U4.33 19.39,6.61 18.94,6.61 18.8,6.75 U4.3 ; v1(6.25,37.5) 5.47,36.72 Q21.1 ; R43.2 3.13,16.4 ; R43.2 2.66,16.36 Q7.1 v1(3.46,15.46) ; R43.2 2.7,15.9 ; R43.2 2.27,16.4 ; Q2.1 11.25,16.95 v1(10.9,17.3) ; 25.5,26.67 R51.2 ; R51.2 25.5,27.53 ; R51.2 25,27.1 ; R51.2 26,27.1 ; Y4.3 13.2,5.18 ; Y4.3 13.2,4.42 ; Y4.3 v1(11.8,4.8) ; U1.33 23,17.53 ; U1.33 22.25,16.75 21.36,16.75 21.33,16.72 21.3,16.75 U1.3 19.75,16.75 19.5,16.5 19.5,16.1 19.29,15.89 18.31,15.89 18.1,16.1 18.1,18.42 18.28,18.6 R59.2 ; U1.33 22.89,15.89 21.74,15.89 21.6,15.75 U1.5 ; U1.33 23,14.47 ; 25.72,31.08 Q10.1 ; Q10.1 26.09,31.71 v1(26.24,31.86) ; Q10.1 26.45,31.08 ; Q3.1 10.87,20.46 10.6,20.19 v1(10.6,20.1) ; Q3.1 11.25,20.83 ; Q3.1 11.61,20.46 ; 26.63,36.5 R50.2 26.2,36 ; v1(1.88,35) 1.88,35.49 2,35.61 Q22.1 ; Q20.1 8.62,35.61 8.75,35.74 v1(8.75,36.88) ; Q4.1 8.66,20.46 v1(8.8,20.6) ; 13.92,11.7 Y1.3 ; Y1.3 14.3,12.63 ; R67.2 34.42,3.03 Q31.1 v1(35.13,2.97) ; Q9.1 28.9,31.55 v1(28.74,31.71) ; Q19.1 12.29,35.61 v1(12.4,35.5) ; 22.2,38.7 R48.2 ; R48.2 22.2,39.7 ; R48.2 22.4,39.2 22.7,39.5 v1(22.77,39.5) ; R48.2 21.77,39.2 ; Q27.1 v1(25.9,7) 25.9,8 R63.2 ; v1(6.2,17) 5.47,16.27 Q8.1 ; U3.21 20.85,24.25 v1(21.3,24.7) ; 28.14,20.57 R41.2 29,20.57 ; 28.9,36 R49.2 29.33,36.5 ; C3.2 18.05,15.31 ; C3.2 17.62,15.81 ; C2.2 14.65,6.25 15,5.9 v1(15,5.3) ; Q17.1 v1(8.28,32) ; 23.47,25.4 R55.2 24.33,25.4 ; C4.2 11.89,23.27 ; C4.2 11.46,23.78 ; 23.3,30.17 R52.2 ; R52.2 23.3,31.03 ; R52.2 22.8,30.6 ; Q24.1 v1(5.47,32) ; Q23.1 v1(2.5,32)
  TOP w0.2: U3.3 v1(13.75,24.75)
  TOP w0.25: R38.2 28.57,17.17 28.29,16.89 R37.2 ; R59.2 R60.2 ; R58.2 R57.2 R56.2 ; R45.2 24,30.6 R52.2 ; R47.2 24.4,35.9 R46.2 ; R55.2 R54.2 R53.2
  vias: v1(8,9.6) v1(8.6,9.6) v1(9.2,9.6) v1(9.8,9.6) v1(16,25) v1(16,24.5) v1(16,23) v1(16.6,25) v1(16.6,24.5) v1(17.2,25) v1(17.2,24.5) v1(17.2,23) v1(19.1,35) v1(19.1,34.5) v1(19.1,33) v1(19.1,7) v1(19.1,5.5) v1(19.1,5) v1(19.6,35) v1(19.6,34.5) v1(19.6,7) v1(19.6,5.5) v1(19.6,5) v1(20.1,35) v1(20.1,34.5) v1(20.1,5.5) v1(20.1,5) v1(20.2,7) v1(20.6,35) v1(20.6,34.5) v1(20.9,33) v1(21.9,15.5) v1(21.9,15) v1(22.4,15.5) v1(22.4,15) v1(23.5,15.5) v1(23.5,15)
CS0: length 14.6
  TOP w0.127: U2.14 v1(20.7,32.1)
  LAYER_2 w0.127: v1(20.7,32.1) 21.33,31.47 21.33,28.87 22.6,27.6 30.72,27.6 30.89,27.77 v1(31.28,27.77)
CS1: length 44.4
  TOP w0.127: v1(20.62,2.03) 20.7,2.11 U4.14 ; J2.1 29.23,11.77 v1(28.8,12.2)
  LAYER 1 w0.127: v1(28.8,10) 28.8,11.81 28.8,11.81 v1(28.8,12.2)
  LAYER_2 w0.127: v1(20.62,2.03) 21.07,1.58 38.91,1.58 39.89,2.56 39.89,9.31 39.21,10 v1(28.8,10)
CS2: length 37.9
  TOP w0.127: J3.3 7.64,25.23 6.64,24.22 2.07,24.22 1.64,24.65 v1(1.64,25.23) ; U3.14 v1(17.7,20.1)
  LAYER_2 w0.127: v1(1.64,25.23) 5.7,25.23 6.09,24.84 10,24.84 10.96,25.8 14,25.8 14.6,26.4 19,26.4 19.17,26.23 19.17,24.48 19.55,24.1 20.41,24.1 20.54,23.97 20.54,22.82 20.41,22.7 20.41,21.82 20.15,21.56 17.96,21.56 17.7,21.29 v1(17.7,20.1)
CS3: length 30
  TOP w0.127: U1.14 v1(23.7,12.54) ; v1(11.2,13.2) 10.81,13.2 10.61,13.4 6.8,13.4 6.38,12.98 6.38,12.54 5.61,11.77 J4.1 3.83,11.77 v1(3.6,12)
  LAYER 1 w0.127: v1(23.7,12.54) 23.7,13.14 24.17,13.61 24.17,15.55 24.18,15.57 24.18,15.81 23.77,16.23 21.9,16.23 21.5,16.63 18.57,16.63 17.9,15.96 17.9,14.8 17.5,14.4 15.8,14.4 14.89,13.49 14.89,12.84 14.45,12.4 11.4,12.4 11.2,12.6 v1(11.2,13.2)
DRV0_COL0: length 1.9
  TOP w0.2: U2.30 19.2,37.47 19.52,37.79 R18.1
DRV0_COL1: length 1.8
  TOP w0.127: R17.1 18.74,37.8 18.7,37.75 U2.31
DRV0_COL2: length 2.4
  TOP w0.127: U2.32 18.2,36.65 17.92,36.93 17.72,36.93 17.49,37.16 17.49,37.8 17.93,38.24 R16.1
DRV0_COL3: length 1.8
  TOP w0.2: U2.1 16.72,35.75 16.39,36.08 R15.1
DRV0_COL4: length 1.7
  TOP w0.2: U2.2 15.86,35.25 R14.1
DRV0_COL5: length 2.5
  TOP w0.2: R11.1 16.05,31.55 U2.9
DRV0_COL6: length 1.7
  TOP w0.2: R13.1 18.74,30.34 18.7,30.39 18.7,30.64 U2.10
DRV0_COL7: length 1.8
  TOP w0.2: R12.1 19.52,30.17 19.41,30.28 19.41,30.46 19.2,30.67 U2.11
DRV0_RESET: length 24.7
  TOP w0.127: v1(29,28) R10.1 28.5,26.5 29,26 29,25.48 29.25,25.23 J1.2 ; U2.29 v1(19.7,37.16)
  LAYER_2 w0.127: v1(19.7,37.16) 19.96,36.9 20.9,36.9 21.3,36.5 21.3,34.05 20.95,33.7 20.6,33.7 20.4,33.5 20.4,32.8 20.6,32.6 20.9,32.6 21.25,32.25 21.25,31.95 21.6,31.6 21.6,29.1 22.1,28.6 28.4,28.6 v1(29,28)
DRV0_ROW0: length 15.4
  TOP w0.127: R45.1 23.74,31.86 v1(23.74,33.11) 23.74,34.76 23.25,35.25 U2.23 ; 29.52,30.58 v1(29.52,30.18) ; 29.52,30.58 Q9.2 ; 29.52,30.58 Q9.5
  LAYER 1 w0.127: v1(23.74,33.11) 23.74,31.08 24.21,30.62 29.09,30.62 v1(29.52,30.18)
DRV0_ROW1: length 32.1
  TOP w0.127: 27.17,30.58 Q10.5 ; 27.17,30.58 Q10.2 ; 27.17,30.58 v1(27.17,30.15) ; v1(23.9,35.5) 23.62,35.78 22.43,35.78 U2.24 23.45,35.75 R46.1
  LAYER 1 w0.127: v1(27.17,30.15) 27.4,30.15 27.44,30.19 28.21,30.19 28.6,29.8 28.6,28.99 28.99,28.6 30.4,28.6 30.58,28.78 30.58,29.95 30.59,30.16 31.39,30.97 35.18,30.97 35.46,31.24 35.46,33.58 34.83,34.21 33.61,34.21 32.91,33.51 29.29,33.51 28.7,34.1 24.16,34.1 23.9,34.36 23.9,35.11 23.9,35.11 v1(23.9,35.5)
DRV0_ROW2: length 21.9
  TOP w0.127: 23.43,36.71 23.43,37.35 23.1,37.68 23.1,38.7 23.7,39.3 34.6,39.3 34.99,38.91 34.99,35.11 ; 23.43,36.71 23.17,36.45 U2.25 ; 23.43,36.71 23.4,36.74 R47.1 ; Q11.5 34.99,35.11 ; 34.99,35.11 Q11.2
DRV0_ROW3: length 35.4
  TOP w0.127: 21.2,37.13 21.33,37.26 22.56,37.26 22.8,37.5 22.8,38.8 23.8,39.8 35.7,39.8 36.3,39.2 36.3,36.8 36.6,36.5 37.34,36.5 37.34,36.5 37.4,36.5 37.8,36.1 37.8,34.3 37.8,34.15 37.45,33.8 36.1,33.8 35.6,33.3 33.6,33.3 33.35,33.55 33.35,33.9 33.58,34.13 33.89,34.13 34,34.24 34,35 33.89,35.11 Q12.5 v1(32.18,35.11) Q12.2 ; 21.2,37.13 21,37.33 21,38.3 21.2,38.5 R48.1 ; 21.2,37.13 U2.26
DRV0_ROW4: length 19.9
  TOP w0.127: U2.27 20.7,37.72 v1(20.46,37.96) ; 29.9,35.11 v1(29.37,35.11) Q13.2 ; 29.9,35.11 R49.1 ; 29.9,35.11 Q13.5
  LAYER 1 w0.127: v1(29.37,35.11) 30.61,35.11 30.88,35.38 30.88,38.27 30.77,38.38 23.29,38.38 23.25,38.34 22.29,38.34 22.25,38.38 20.89,38.38 v1(20.46,37.96)
DRV0_ROW5: length 12.8
  TOP w0.127: 27.4,35.11 27.4,35.34 27.39,35.34 27.39,35.71 27.2,35.9 R50.1 ; 27.4,35.11 Q14.5 ; 27.4,35.11 27.23,35.11 27.18,35.07 26.86,35.07 26.82,35.11 v1(26.55,35.11) Q14.2 ; U2.28 20.2,37.44 v1(20.15,37.49)
  LAYER 1 w0.127: v1(20.15,37.49) 21.79,37.49 22.02,37.26 26.24,37.26 26.7,36.8 26.7,35.65 26.66,35.61 26.66,35.61 26.55,35.5 v1(26.55,35.11)
DRV0_ROW6: length 21.5
  TOP w0.127: U2.12 19.7,30.6 20.1,30.2 20.1,29.7 20.3,29.5 20.3,29.33 20.32,29.31 20.32,28.98 20.56,28.74 25.5,28.74 ; v1(35.15,30.03) 35.15,30.58 ; 35.15,30.58 Q15.5 ; 35.15,30.58 Q15.2 34.14,30.58 33.9,30.34 33.9,29.05 33.58,28.74 25.5,28.74 ; 25.5,28.74 R51.1
DRV0_ROW7: length 18
  TOP w0.127: 32.49,30.58 v1(32.49,30.18) 32.49,29.37 32.18,29.05 27.85,29.05 27.84,29.05 27.09,29.05 27.08,29.05 23.3,29.05 ; 32.49,30.58 Q16.2 ; 32.49,30.58 Q16.5 ; 23.3,29.05 20.93,29.05 20.57,29.42 20.57,30.2 20.2,30.57 U2.13 ; 23.3,29.05 R52.1
DRV1_COL0: length 2.1
  TOP w0.127: R36.1 19.52,9.99 19.2,9.67 U4.30
DRV1_COL1: length 2
  TOP w0.127: U4.31 18.7,8.99 18.74,9.03 R35.1
DRV1_COL2: length 2.1
  TOP w0.127: U4.32 18.2,8.99 17.96,9.23 R34.1
DRV1_COL3: length 2.1
  TOP w0.127: U4.1 16.15,7.75 15.94,7.97 R33.1
DRV1_COL4: length 2
  TOP w0.127: U4.2 16.57,7.25 16.56,7.26 16.05,7.26 16.04,7.25 16,7.25 15.94,7.19 R32.1
DRV1_COL5: length 2.9
  TOP w0.127: U4.9 15.89,3.55 15.78,3.44 R29.1
DRV1_COL6: length 1.8
  TOP w0.127: U4.10 18.7,3.16 18.36,2.82 18.36,2.42 18.43,2.35 R31.1
DRV1_COL7: length 1.6
  TOP w0.127: U4.11 19.2,3.01 19.21,3 R30.1
DRV1_RESET: length 34.6
  TOP w0.127: R28.1 38.74,12.96 38.58,12.8 v1(38.58,12.34) 38.58,10.38 38.3,10.1 33.35,10.1 32.49,9.23 J2.2 ; U4.29 v1(19.7,7.83)
  LAYER_2 w0.127: v1(38.58,12.34) 38.19,12.34 37.8,11.95 37.8,11.25 37.44,10.89 19.95,10.89 19.29,10.23 19.29,8.24 v1(19.7,7.83)
DRV1_ROW0: length 14.7
  TOP w0.127: 30.1,2.47 Q25.5 ; 30.1,2.47 30.1,2.95 29.84,3.21 R61.1 ; 30.1,2.47 v1(29.52,2.47) Q25.2
  TOP w0.2: U4.23 v1(23.18,7.25)
  LAYER 1 w0.127: v1(29.52,2.47) 26.95,2.47 26.57,2.08 25.25,2.08 24.8,2.53 24.02,2.53 23.7,2.85 23.7,6.73 v1(23.18,7.25)
DRV1_ROW1: length 11.8
  TOP w0.127: R62.1 26.4,3.16 v1(26.4,2.47) ; v1(26.4,2.47) Q26.5 ; v1(26.4,2.47) Q26.2
  TOP w0.2: U4.24 v1(23.72,7.75)
  LAYER 1 w0.127: v1(23.72,7.75) 23.72,7.08 23.97,6.84 23.97,6.82 23.99,6.79 23.99,3.97 24.37,3.59 26.09,3.59 26.4,3.28 v1(26.4,2.47)
DRV1_ROW2: length 12.1
  TOP w0.127: 26.54,6 26.55,6.01 v1(26.55,7.47) 26.55,8.44 25.98,9.01 R63.1 ; 26.54,6 Q27.2 ; 26.54,6 Q27.5 ; v1(22.02,9.53) 21.7,9.2 U4.25
  LAYER_2 w0.127: v1(26.55,7.47) 24.43,7.47 24.11,7.79 24.11,8.59 23.45,9.25 22.63,9.25 22.61,9.27 22.29,9.27 v1(22.02,9.53)
DRV1_ROW3: length 16.5
  TOP w0.127: 29.4,6 Q28.5 ; 29.4,6 29.37,6.03 v1(29.37,7.47) 29.71,7.81 R64.1 ; 29.4,6 Q28.2
  TOP w0.2: U4.26 v1(21.2,9.77)
  LAYER_2 w0.127: v1(21.2,9.77) 21.2,9.2 21.4,9 22.5,9 22.79,8.71 22.79,7.02 23.31,6.5 26.5,6.5 27.47,7.47 v1(29.37,7.47)
DRV1_ROW4: length 22.1
  TOP w0.127: Q29.2 32.1,6 ; 32.1,6 Q29.5 33.51,6 33.62,6.11 33.67,6.11 33.79,6.23 33.79,6.77 33.77,6.79 R65.1 ; 32.1,6 32.18,6.08 v1(32.18,7.47) ; U4.27 v1(20.7,10.23)
  LAYER_2 w0.127: v1(32.18,7.47) 31.01,6.3 26.68,6.3 26.61,6.23 23.2,6.23 23.18,6.25 23.1,6.25 22.5,6.85 22.5,8.3 22.2,8.6 21.3,8.6 20.7,9.2 v1(20.7,10.23)
DRV1_ROW5: length 23.9
  TOP w0.127: R66.1 35.44,7.12 35.18,6.86 ; v1(34.99,7.47) 34.99,7.05 35.18,6.86 ; 35.18,6.86 35.18,6 ; 35.18,6 Q30.2 ; 35.18,6 Q30.5
  TOP w0.2: U4.28 v1(20.2,9.79)
  LAYER_2 w0.127: v1(34.99,7.47) 33.86,7.47 32.33,5.94 22.9,5.94 22.2,6.64 22.2,8.1 21.97,8.33 20.97,8.33 20.2,9.1 v1(20.2,9.79)
DRV1_ROW6: length 20.8
  TOP w0.127: 35.69,2.47 v1(34.83,2.47) Q31.2 ; 35.69,2.47 35.69,2.68 35.67,2.7 35.67,2.94 35.43,3.19 R67.1 ; 35.69,2.47 Q31.5
  TOP w0.2: U4.12 v1(19.7,2.48)
  LAYER 1 w0.127: v1(19.7,2.48) 19.7,2.01 20.11,1.6 23.34,1.6 23.48,1.74 23.68,1.74 23.69,1.73 24.46,1.73 24.92,1.28 24.94,1.28 25.15,1.07 28.36,1.07 28.59,1.3 33,1.3 34.17,2.47 v1(34.83,2.47)
DRV1_ROW7: length 16.8
  TOP w0.127: Q32.2 v1(32.18,2.47) 33.02,2.47 ; 33.02,2.47 Q32.5 ; 33.02,2.47 33.02,2.69 33.02,2.7 33.02,3.07 32.76,3.33 R68.1
  TOP w0.2: U4.13 v1(20.2,2.82)
  LAYER 1 w0.127: v1(32.18,2.47) 31.31,1.6 28.51,1.6 28.25,1.34 25.26,1.34 25.05,1.55 25.03,1.55 24.57,2 23.8,2 23.78,2.02 23.71,2.02 23.69,2.03 21.71,2.03 20.92,2.82 v1(20.2,2.82)
DRV2_COL0: length 2.3
  TOP w0.127: R27.1 16.3,28.3 16.3,28.22 16.29,28.2 16.29,28.19 16.17,28.07 16.17,27.64 16.2,27.61 U3.30
DRV2_COL1: length 2.1
  TOP w0.127: R26.1 15.78,28.11 15.7,28.04 U3.31
DRV2_COL2: length 2.3
  TOP w0.127: R25.1 15.2,28.19 U3.32
DRV2_COL3: length 2
  TOP w0.2: R24.1 12.94,25.77 12.96,25.75 U3.1
DRV2_COL4: length 2.2
  TOP w0.2: U3.2 13.92,25.25 13.87,25.3 13.25,25.3 12.94,24.99 R23.1
DRV2_COL5: length 2.7
  TOP w0.2: R22.1 14.82,21.56 14.82,21.55 U3.9
DRV2_COL6: length 1.7
  TOP w0.2: R21.1 15.7,19.88 U3.10
DRV2_COL7: length 1.8
  TOP w0.2: U3.11 16.2,20.82 16.3,20.72 16.3,20.06 R20.1
DRV2_RESET: length 17.2
  TOP w0.127: U3.29 16.7,27.66 v1(16.56,27.8) ; J3.2 4.41,26.5 4.7,26.8 10.79,26.8 11.18,27.18 11.18,27.58 11.56,27.96 v1(12.18,27.96) 12.18,28.55 R19.1
  LAYER_2 w0.127: v1(12.18,27.96) 12.96,27.18 13.24,27.18 13.24,27.35 13.45,27.56 13.75,27.56 13.94,27.37 14.37,27.8 v1(16.56,27.8)
DRV2_ROW0: length 23.8
  TOP w0.127: 9.06,30.58 v1(9.06,30.33) ; 9.06,30.58 Q17.2 ; 9.06,30.58 Q17.5 ; R53.1 22.46,23.7 22.36,23.8 22.36,24.64 22.15,24.86 21.66,24.86 21.4,25.11 20.43,25.11 v1(20.15,24.84) 19.74,25.25 U3.23
  LAYER 1 w0.127: v1(9.06,30.33) 8.63,30.33 8.3,30 8.3,27.1 8.61,26.79 11.66,26.79 11.83,26.61 18.99,26.61 19.6,26 19.6,25.39 v1(20.15,24.84)
DRV2_ROW1: length 20.9
  TOP w0.127: v1(20.15,25.46) 20.15,25.54 19.94,25.75 ; 12.18,30.58 v1(12.18,30.33) ; 12.18,30.58 Q18.2 ; 12.18,30.58 Q18.5 ; 19.94,25.75 U3.24 ; 19.94,25.75 21.25,25.75 21.88,25.12 22.26,25.12 22.29,25.1 22.3,25.1 22.8,24.6 R54.1
  LAYER_2 w0.127: v1(20.15,25.46) 20.15,27.26 20.54,27.65 20.54,28.31 20.3,28.55 20.3,30.11 20.54,30.35 20.54,30.85 20.18,31.21 13.06,31.21 v1(12.18,30.33)
DRV2_ROW2: length 23.7
  TOP w0.127: Q19.5 12.57,35.11 12.47,35.02 12.11,35.02 v1(12.01,35.11) Q19.2 ; v1(18.89,27.18) 18.7,26.99 U3.25 19.37,26.45 19.39,26.43 20.97,26.43 22,25.4 R55.1
  LAYER 1 w0.127: v1(18.89,27.18) 18.35,27.18 18.04,27.49 18.04,27.68 16.98,28.74 10.96,28.74 10.57,29.13 10.57,33.41 10.56,33.42 10.56,34.69 10.98,35.11 v1(12.01,35.11)
DRV2_ROW3: length 30.8
  TOP w0.127: Q20.5 v1(9.05,35.11) Q20.2 ; U3.26 18.2,27.42 v1(18.43,27.65) 18.93,27.65 19.25,27.33 19.25,26.95 19.5,26.7 21.3,26.7 21.8,26.2 R56.1
  LAYER 1 w0.127: v1(9.05,35.11) 9.05,36.35 9.3,36.6 12.5,36.6 12.88,36.22 12.88,34.78 12.62,34.52 11.09,34.52 10.83,34.26 10.83,33.53 10.83,33.52 10.83,29.37 11.19,29.01 17.46,29.01 18.43,28.04 v1(18.43,27.65)
DRV2_ROW4: length 27.1
  TOP w0.127: R57.1 22.63,27.27 22.33,27.27 21.9,27.7 20.62,27.7 20.47,27.54 19.43,27.54 18.96,28.01 18.17,28.01 v1(17.65,27.49) 17.7,27.44 U3.27 ; Q21.5 v1(6.08,35.11) Q21.2
  LAYER 1 w0.127: v1(17.65,27.49) 17.37,27.21 16.63,27.21 16.28,27.56 10.34,27.56 10,27.9 10,33.1 8.87,34.23 6.45,34.23 6.08,34.6 v1(6.08,35.11)
DRV2_ROW5: length 30.9
  TOP w0.127: U3.28 v1(17.2,27.79) 17.2,28.7 17.9,29.4 19.85,29.4 20.05,29.2 20.05,28.75 20.33,28.47 22.74,28.47 22.9,28.32 R58.1 ; Q22.2 v1(3.59,35.11) Q22.5
  LAYER 1 w0.127: v1(3.59,35.11) 4.09,35.61 6.4,35.61 7.38,34.63 8.97,34.63 10.3,33.3 10.3,28.7 10.65,28.35 16.64,28.35 v1(17.2,27.79)
DRV2_ROW6: length 28.2
  TOP w0.127: R59.1 18.73,19.6 18.34,19.22 17.28,19.22 17.05,19.45 17.05,20.28 v1(16.87,20.46) 16.7,20.63 U3.12 ; 3.59,30.58 v1(3.59,30.33) ; 3.59,30.58 Q23.2 ; 3.59,30.58 Q23.5
  LAYER 1 w0.127: v1(16.87,20.46) 15.84,20.46 13.39,22.91 13.39,23.81 12.21,24.99 3.51,24.99 2.81,25.69 2.81,29.94 3.2,30.33 v1(3.59,30.33)
DRV2_ROW7: length 29.8
  TOP w0.127: U3.13 17.2,21.01 17.37,20.84 17.37,20.28 17.34,20.25 17.34,19.86 17.52,19.68 18.01,19.68 18.43,20.1 19.2,20.1 19.6,19.7 R60.1 v1(20.1,19.6) ; 6.4,30.58 v1(6.4,30.3) ; 6.4,30.58 Q24.5 ; 6.4,30.58 Q24.2
  GND w0.127: v1(20.1,19.6) 20.1,19.99 20.1,20.9 19.7,21.3 10.8,21.3 10.2,21.9 10.2,24.4 9.6,25 8.6,25 8.2,25.4 8.2,29.5 7.4,30.3 v1(6.4,30.3)
DRV3_COL0: length 2.1
  TOP w0.127: U1.30 22.2,18.99 22.3,19.09 22.3,19.52 22.29,19.53 22.29,19.83 22.3,19.85 22.3,20.24 R9.1
DRV3_COL1: length 2
  TOP w0.127: U1.31 21.71,18.46 v1(21.71,19.84) R8.1
DRV3_COL2: length 2.5
  TOP w0.127: U1.32 21.2,19.72 20.93,19.99 R7.1 v1(20.49,20.43)
DRV3_COL3: length 1.9
  TOP w0.127: U1.1 19.12,17.75 19.06,17.81 R6.1
DRV3_COL4: length 2
  TOP w0.127: R5.1 19.06,17.03 19.28,17.25 U1.2
DRV3_COL5: length 2.6
  TOP w0.127: R2.1 19.06,13.59 19.1,13.55 U1.9
DRV3_COL6: length 1.7
  TOP w0.127: U1.10 21.7,12.36 21.71,12.34 R4.1
DRV3_COL7: length 1.8
  TOP w0.127: R3.1 22.24,12.16 22.24,12.24 22.23,12.25 22.23,12.98 22.2,13.01 U1.11
DRV3_RESET: length 35.8
  TOP w0.127: J4.4 7.64,11.77 6.77,10.9 2.54,10.9 2.5,10.93 2.48,10.93 2.36,11.05 2.36,11.07 2,11.44 v1(2,12.22) R1.1 ; U1.29 22.7,18.01 v1(22.65,17.96)
  GND w0.127: v1(22.65,17.96) 21.89,17.2 13.6,17.2 13,16.6 13,12.4 12,11.4 2.81,11.4 v1(2,12.22)
DRV3_ROW0: length 22.4
  TOP w0.127: Q1.5 v1(8.9,14.96) Q1.2 ; v1(26.18,17.25) 26.57,17.25 R37.1
  TOP w0.2: U1.23 v1(26.18,17.25)
  LAYER 1 w0.127: v1(8.9,14.96) 10.97,14.96 11.56,14.37 12.4,14.37 13.13,15.1 14.9,15.1 15.68,15.88 17.4,15.88 17.44,15.92 17.47,15.92 18.46,16.9 21.61,16.9 22.01,16.5 24.93,16.5 25.68,17.25 v1(26.18,17.25)
DRV3_ROW1: length 19.8
  TOP w0.127: R38.1 26.88,17.91 v1(26.72,17.75) ; Q2.2 v1(12.34,14.96) Q2.5
  TOP w0.2: U1.24 v1(26.72,17.75)
  LAYER 1 w0.127: v1(26.72,17.75) 25.72,17.75 24.73,16.77 22.12,16.77 21.72,17.17 21.7,17.17 21.67,17.2 18.4,17.2 18.37,17.17 18.35,17.17 17.36,16.18 17.33,16.18 17.31,16.17 14.63,16.17 14.08,15.62 13,15.62 v1(12.34,14.96)
DRV3_ROW2: length 25.6
  TOP w0.127: R39.1 27.13,18.8 26.78,18.45 U1.25 v1(24.7,20.29) ; Q3.5 v1(11.71,19.96) Q3.2
  LAYER 1 w0.127: v1(24.7,20.29) 24.7,17.51 24.22,17.03 22.23,17.03 21.83,17.43 21.81,17.43 21.78,17.47 21.76,17.47 21.73,17.5 18.3,17.5 17.83,17.03 12.77,17.03 12.4,17.4 12,17.4 11.56,17.84 11.56,19.42 11.71,19.57 v1(11.71,19.96)
DRV3_ROW3: length 29.3
  TOP w0.127: Q4.5 9.6,19.96 9.49,20.07 9.25,20.07 9.14,19.96 v1(8.75,19.96) Q4.2 ; R40.1 27.13,19.68 27,19.56 26.14,19.56 25.05,20.65 24.35,20.65 24.2,20.5 v1(24.2,19.77)
  TOP w0.2: U1.26 v1(24.2,19.77)
  LAYER 1 w0.127: v1(8.75,19.96) 9.25,19.96 9.25,19.96 9.66,19.96 10.59,20.89 12.14,20.89 12.33,20.7 12.33,20.69 12.36,20.66 12.36,20.36 12.33,20.32 12.33,19.28 12.33,18.19 12.37,18.15 12.37,18.13 13.16,17.34 15.85,17.34 15.85,17.34 16.15,17.34 16.15,17.34 17.64,17.34 18.1,17.8 21.78,17.8 21.82,17.77 21.84,17.77 21.87,17.73 21.89,17.73 21.92,17.7 21.94,17.7 22.34,17.3 23.96,17.3 24.21,17.55 24.21,17.94 24.2,17.95 v1(24.2,19.77)
